# EAGLE board usbisp_altoids (EAGLE 5.02)
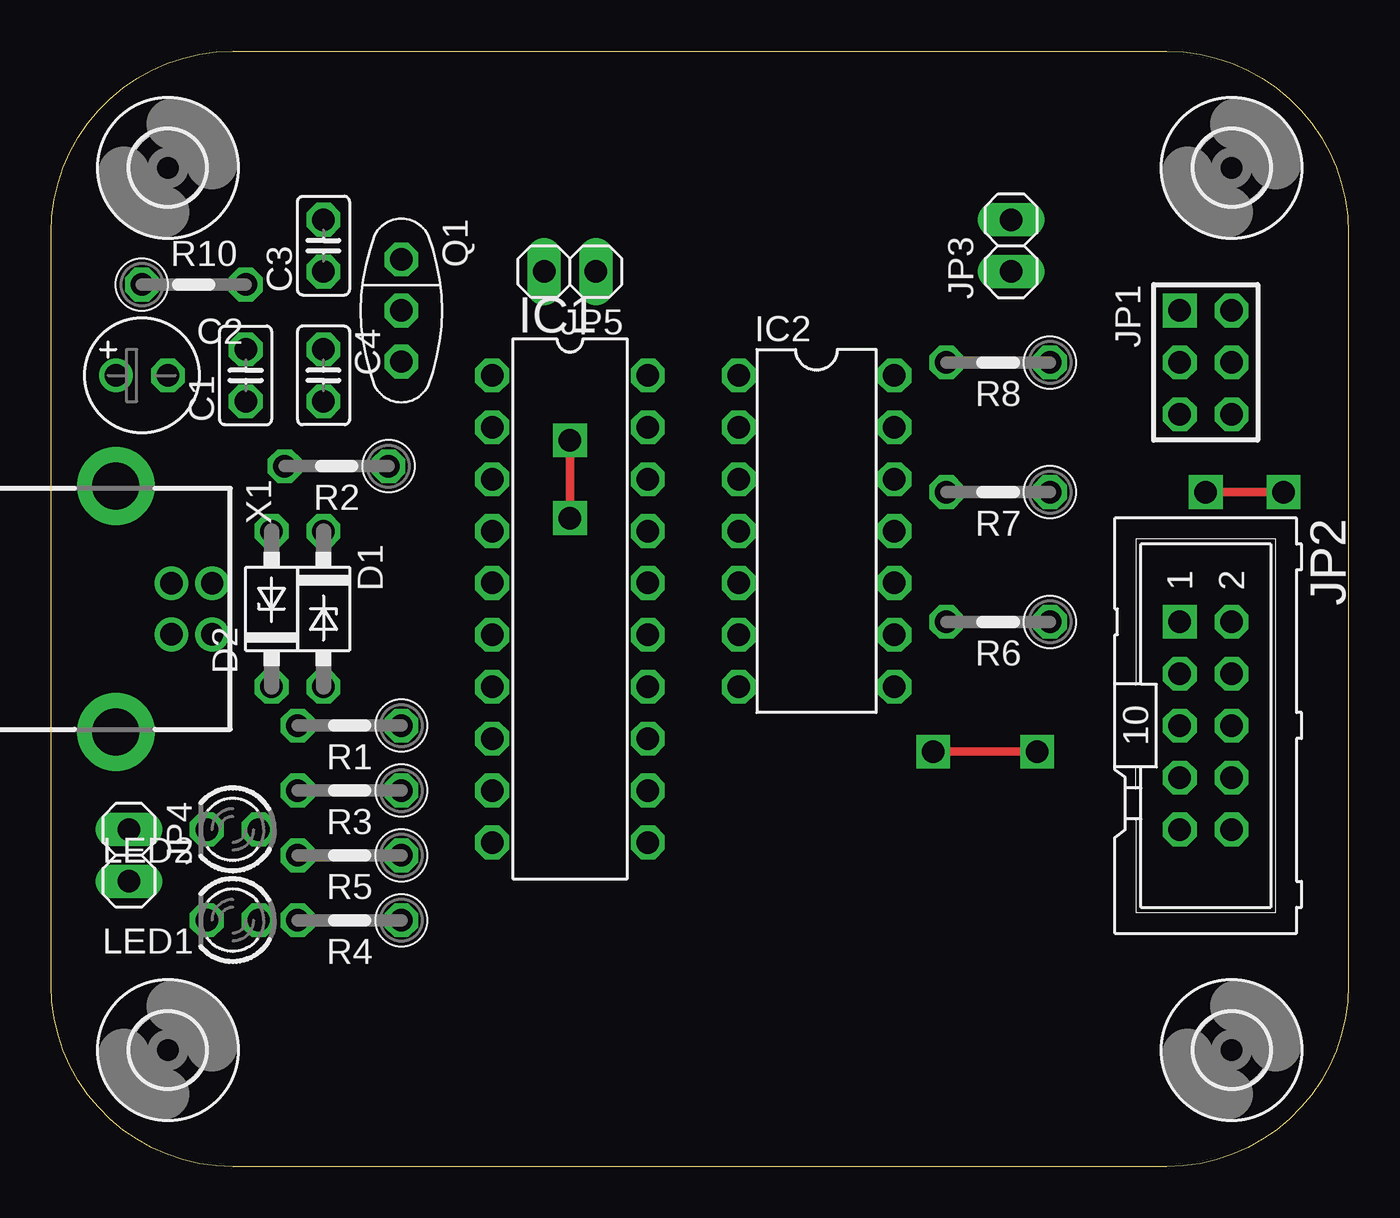
[diagram p0: board, top side]
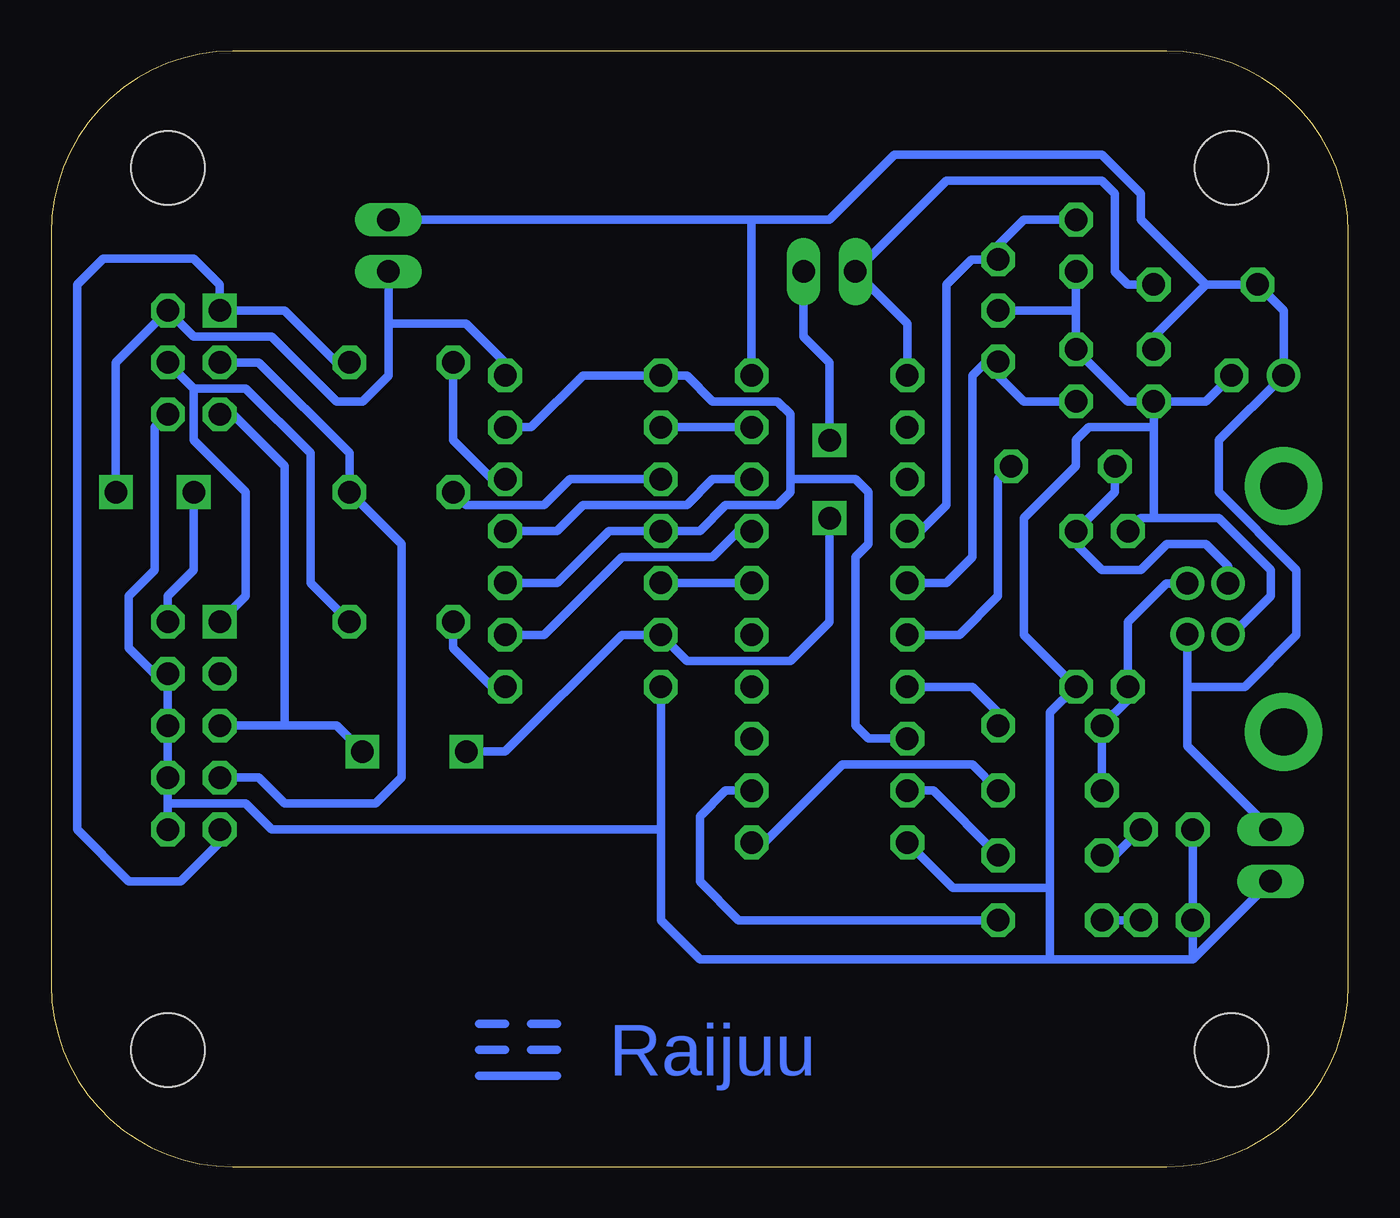
[diagram p1: board, bottom side, seen from below]

Size 63.5 x 54.61 mm. Coordinates in mm from the lower left corner, seen from the top.
Outline: 63.5,8.89 arc-90 54.61,0 8.89,0 arc-90 0,8.89 0,45.72 arc-90 8.89,54.61 54.61,54.61 arc-90 63.5,45.72 63.5,8.89
Copper layers (1*16): Top 0.035mm / dielectric 1.5mm / Bottom 0.035mm
Design rules "default": minimum track width 10mil, minimum drill 24mil, track to track 8mil, track to pad 8mil, pad to pad 8mil, via to via 8mil, smd to smd 8mil, copper to edge 40mil, drill to drill 8mil, minimum pad ring 10mil, minimum via ring 8mil, stop-mask expansion 4mil, vias tented up to drill 0mil, thermal gap 10mil

## Footprints (pad centres in the part's own frame; a part is rotated, then mirrored left to right if it is on the bottom)
C025-025X050 = drill 1.1 octagon: 1 -1.27,0; 2 1.27,0
E2,5-6 = drill 1.1 round: + -1.27,0 | drill 1.1 pad 1.6 octagon: - 1.27,0
DO41Z10 = drill 1.1 octagon: A 3.81,0; C -3.81,0
DIL20 = drill 1.1 octagon: 1 -11.43,-3.81; 2 -8.89,-3.81; 3 -6.35,-3.81; 4 -3.81,-3.81; 5 -1.27,-3.81; 6 1.27,-3.81; 7 3.81,-3.81; 8 6.35,-3.81; 9 8.89,-3.81; 10 11.43,-3.81; 11 11.43,3.81; 12 8.89,3.81; 13 6.35,3.81; 14 3.81,3.81; 15 1.27,3.81; 16 -1.27,3.81; 17 -3.81,3.81; 18 -6.35,3.81; 19 -8.89,3.81; 20 -11.43,3.81
DIL14 = drill 1.1 octagon: 1 -7.62,-3.81; 2 -5.08,-3.81; 3 -2.54,-3.81; 4 0,-3.81; 5 2.54,-3.81; 6 5.08,-3.81; 7 7.62,-3.81; 8 7.62,3.81; 9 5.08,3.81; 10 2.54,3.81; 11 0,3.81; 12 -2.54,3.81; 13 -5.08,3.81; 14 -7.62,3.81
AVR-ISP-6 = drill 1.1 square: 1 -2.54,-1.27 | drill 1.1 octagon: 2 -2.54,1.27; 3 0,-1.27; 4 0,1.27; 5 2.54,-1.27; 6 2.54,1.27
ML10 = drill 1.1 square: 1 -5.08,-1.27 | drill 1.1 octagon: 2 -5.08,1.27; 3 -2.54,-1.27; 4 -2.54,1.27; 5 0,-1.27; 6 0,1.27; 7 2.54,-1.27; 8 2.54,1.27; 9 5.08,-1.27; 10 5.08,1.27
1X02 = drill 1.1 long: 1 -1.27,0; 2 1.27,0
LED3MM = drill 1.1 octagon: A -1.27,0; K 1.27,0
CSTLS_G9 = drill 1.1 octagon: 1 -2.5,0; 2 0,0; 3 2.5,0
0207/5V = drill 1.1 octagon: 1 -2.54,0; 2 2.54,0
3,6 = hole 3.6: 0,0
USB-B = drill 1.1 round: 1 1.25,4.71; 2 -1.25,4.71; 3 -1.25,2.71; 4 1.25,2.71 | drill 2.3 pad 3.81 round: S1 -6.02,0; S2 6.02,0

## Placement (x,y rotation side)
C1  0.1uF  [C025-025X050]  9.53,38.73 90 top
C2  100uF/16V  [E2,5-6]  4.45,38.73 0 top
C3  22pF  [C025-025X050]  13.34,45.09 90 top
C4  22pF  [C025-025X050]  13.34,38.73 270 top
D1  3.6V  [DO41Z10]  13.34,27.31 270 top
D2  3.6V  [DO41Z10]  10.79,27.31 90 top
IC1  AT90S2313P  [DIL20]  25.4,27.31 270 top
IC2  74HC125N  [DIL14]  37.47,31.12 270 top
JP1  AVR-ISP-6  [AVR-ISP-6]  56.52,39.37 270 top
JP2  AVR-ISP-10'C  [ML10]  56.52,21.59 270 top
JP3  [1X02]  46.99,45.09 90 top
JP4  [1X02]  3.81,15.24 270 top
JP5  [1X02]  25.4,43.81 180 top
LED1  [LED3MM]  8.89,12.06 180 top
LED2  [LED3MM]  8.89,16.51 180 top
Q1  [CSTLS_G9]  17.14,41.91 270 top
R1  27  [0207/5V]  14.61,21.59 180 top
R2  27  [0207/5V]  13.97,34.29 180 top
R3  1.5k  [0207/5V]  14.61,18.42 180 top
R4  1k  [0207/5V]  14.61,12.06 180 top
R5  1k  [0207/5V]  14.61,15.24 180 top
R6  330  [0207/5V]  46.35,26.67 180 top
R7  330  [0207/5V]  46.35,33.02 180 top
R8  330  [0207/5V]  46.35,39.37 180 top
R10  10k  [0207/5V]  6.99,43.18 0 top
U$1  [3,6]  5.71,5.71 0 top
U$2  [3,6]  5.71,48.89 0 top
U$3  [3,6]  57.78,48.89 0 top
U$4  [3,6]  57.78,5.71 0 top
U$5  [LOGO-COPPER]  38.73,4.45 0 top
X1  USBB  [USB-B]  3.17,27.31 270 top

## Library data of the parts
C1-C4 D1 D2 IC1 IC2 JP1-JP5 LED1 LED2 Q1 R1-R8 R10 U$1-U$4 X1 = USBISP
U$5 = logo

## Nets
+5V: C1.2 C2.+ IC1.20 JP3.2 JP4.1 R10.1 X1.1
EN: IC1.8 IC2.1 IC2.4 IC2.10 IC2.13
GND: C1.1 C2.- C3.1 C4.1 D1.A D2.A IC1.10 IC2.7 JP1.6 JP2.4 JP2.6 JP2.8 JP2.10 JP4.2 LED1.K LED2.K Q1.2 X1.4
MISO: JP1.1 JP2.9 R8.1
MISO': IC1.18 IC2.11
MOSI: JP1.4 JP2.1 R6.1
MOSI': IC1.17 IC2.9
N$1: C3.2 IC1.4 Q1.1
N$2: C4.2 IC1.5 Q1.3
N$3: IC1.6 R2.1
N$4: IC1.7 R1.1
N$5: D1.C R2.2 X1.3
N$6: D2.C R1.2 R3.2 X1.2
N$7: IC1.11 R3.1
N$8: IC1.9 R5.1
N$9: IC1.12 R4.1
N$10: LED2.A R5.2
N$11: LED1.A R4.2
N$12: IC1.1 JP5.2 R10.2
N$13: IC2.14 JP1.2 JP2.2 JP3.1
N$15: IC2.12 R8.2
N$16: IC2.3 R7.2
N$17: IC2.8 R6.2
RST: IC2.6 JP1.5 JP2.5 JP5.1
RST': IC1.16 IC2.5
SCK: JP1.3 JP2.7 R7.1
SCK': IC1.19 IC2.2

## Tracks (layer width: path | path; a pad name or v marks a point on that pad's centre or on a via)
+5V
  Bottom 0.406: 29.21,46.35 25.4,46.35 22.23,49.53 12.06,49.53 10.16,47.62 10.16,46.35 6.99,43.18 | 29.21,46.35 IC1.20 | 7.88,23.5 7.88,20.59 JP4.1 | 7.88,23.5 X1.1 | 7.88,23.5 5.08,23.5 2.54,26.04 2.54,29.21 6.35,33.02 6.35,35.56 C2.+ 3.17,41.91 R10.1 6.99,43.18 | 29.21,46.35 JP3.2 | 6.99,43.18 9.53,40.64 C1.2
EN
  Bottom 0.406: IC2.13 40.01,36.2 37.47,38.73 IC2.1 32.38,38.73 31.11,37.46 27.94,37.46 27.3,36.83 27.3,33.66 | IC2.10 38.73,28.58 36.2,31.12 IC2.4 31.75,31.12 30.48,32.38 27.94,32.38 27.3,33.02 27.3,33.66 | IC1.8 23.5,20.96 24.13,21.59 24.13,29.85 23.5,30.48 23.5,33.02 24.13,33.66 27.3,33.66
GND
  Bottom 0.406: LED2.K LED1.K 7.62,10.16 | 9.53,36.2 C1.1 | C2.- 6.99,37.46 C1.1 | 13.34,41.91 C4.1 10.79,37.46 C1.1 | 13.34,41.91 C3.1 | 7.62,10.16 14.61,10.16 | 14.61,10.16 14.61,13.65 | 9.53,36.2 12.7,36.2 13.34,35.56 13.34,34.29 15.88,31.75 15.88,26.04 D1.A 14.61,22.23 14.61,13.65 | 33.66,16.51 33.66,12.06 31.75,10.16 14.61,10.16 | 33.66,16.51 IC2.7 | 57.78,20.32 JP2.8 57.78,17.78 | 57.78,20.32 JP2.6 JP2.4 58.42,24.13 59.69,25.4 59.69,27.94 58.42,29.21 58.42,36.2 JP1.6 | 57.78,17.78 JP2.10 | 57.78,17.78 57.78,20.32 | 57.78,17.78 53.98,17.78 52.7,16.51 45.09,16.51 33.66,16.51 | JP4.2 7.62,10.16 | 13.34,41.91 Q1.2 | D2.A 10.16,31.75 9.53,31.75 | 9.53,36.2 9.53,31.75 | 9.53,31.75 6.35,31.75 3.81,29.21 3.81,27.94 5.71,26.04 5.74,26.06 X1.4 | IC1.10 19.37,13.65 14.61,13.65
MISO
  Bottom 0.406: 55.88,16.51 JP2.9 54.61,16.51 57.15,13.97 59.69,13.97 62.23,16.51 62.23,43.18 60.96,44.45 56.52,44.45 55.24,43.18 JP1.1 52.07,41.91 49.53,39.37 R8.1
MISO'
  Bottom 0.406: IC2.11 38.73,31.12 37.47,32.38 32.38,32.38 31.11,33.66 IC1.18
MOSI
  Bottom 0.406: 56.52,38.1 JP1.4 | 56.52,38.1 53.98,38.1 50.8,34.92 50.8,28.58 R6.1 | JP2.1 53.98,27.94 53.98,33.02 56.52,35.56 56.52,38.1
MOSI'
  Bottom 0.406: IC1.17 29.84,31.12 31.11,29.85 35.56,29.85 39.37,26.04 IC2.9
N$1
  Bottom 0.406: IC1.4 20.95,31.12 19.68,32.38 19.68,43.18 18.45,44.41 Q1.1 17.14,45.09 15.88,46.35 C3.2
N$2
  Bottom 0.406: IC1.5 19.68,28.58 18.41,29.85 18.41,38.73 17.78,39.37 17.14,39.37 | C4.2 15.88,37.46 17.14,38.73 17.14,39.37 | 17.14,39.37 Q1.3
N$3
  Bottom 0.406: R2.1 17.14,33.66 17.14,27.94 19.05,26.04 IC1.6
N$4
  Bottom 0.406: R1.1 17.14,22.23 18.41,23.5 IC1.7
N$5
  Bottom 0.406: R2.2 11.43,33.02 D1.C 13.34,30.48 12.06,29.21 10.16,29.21 8.89,30.48 6.99,30.48 5.88,29.38 X1.3
N$6
  Bottom 0.406: R3.2 R1.2 10.79,22.86 D2.C 10.79,26.67 8.91,28.56 X1.2
N$7
  Bottom 0.406: IC1.11 28.57,15.88 24.77,19.69 18.41,19.69 R3.1
N$8
  Bottom 0.406: R5.1 20.32,18.42 IC1.9
N$9
  Bottom 0.406: R4.1 29.84,12.06 31.75,13.97 31.75,17.15 30.48,18.42 IC1.12
N$10
  Bottom 0.406: LED2.A 11.43,15.24 R5.2
N$11
  Bottom 0.406: LED1.A R4.2
N$12
  Bottom 0.406: IC1.1 21.59,41.27 JP5.2 19.68,48.26 12.7,48.26 12.06,48.26 11.43,47.62 11.43,43.81 10.79,43.18 R10.2
N$13  (via drill 1.1)
  Top 0.406: v60.33,33.02 v56.52,33.02
  Bottom 0.406: IC2.14 41.27,39.37 43.18,41.27 46.99,41.27 | v56.52,33.02 56.52,29.21 57.78,27.94 JP2.2 | v60.33,33.02 60.33,39.37 JP1.2 56.52,40.64 52.7,40.64 49.53,37.46 48.26,37.46 46.99,38.73 46.99,41.27 | 46.99,41.27 JP3.1
N$15
  Bottom 0.406: IC2.12 41.91,33.66 43.81,35.56 R8.2
N$16
  Bottom 0.406: IC2.3 38.1,33.66 39.37,32.38 43.18,32.38 R7.2
N$17
  Bottom 0.406: IC2.8 41.91,23.5 43.81,25.4 R6.2
RST  (via drill 1.1)
  Top 0.406: v25.4,31.75 v25.4,35.56 | v43.18,20.32 v48.26,20.32
  Bottom 0.406: v25.4,31.75 25.4,26.67 27.3,24.77 32.38,24.77 IC2.6 35.56,26.04 41.27,20.32 v43.18,20.32 | v25.4,35.56 25.4,39.37 26.67,40.64 JP5.1 | JP1.5 54.61,36.83 52.07,34.29 52.07,21.59 | 52.07,21.59 JP2.5 | 52.07,21.59 49.53,21.59 v48.26,20.32
RST'
  Bottom 0.406: IC1.16 IC2.5
SCK
  Bottom 0.406: JP1.3 53.34,39.37 48.9,34.92 R7.1 46.35,30.48 46.35,19.05 47.62,17.78 52.07,17.78 53.34,19.05 JP2.7
SCK'
  Bottom 0.406: IC1.19 IC2.2

## Text on the board
Bottom: Raijuu